# EAGLE board Stunning Densor (2) (EAGLE 9.7.0)

Size 48.21 x 71.32 mm. Coordinates in mm from the lower left corner, seen from the top.
Outline: 0,0 48.21,0 48.21,71.32 0,71.32 0,0
Copper layers (1*16): Top 0.035mm / dielectric 1.5mm / Bottom 0.035mm
Design rules "default": minimum track width 6mil, minimum drill 0.35mm, track to track 6mil, track to pad 6mil, pad to pad 6mil, via to via 6mil, smd to smd 6mil, copper to edge 40mil, drill to drill 6mil, minimum pad ring 10mil, minimum via ring 8mil, stop-mask expansion 4mil, vias tented up to drill 0mil, thermal gap 10mil

## Footprints (pad centres in the part's own frame; a part is rotated, then mirrored left to right if it is on the bottom)
BAT_3002 = smd 3.96 x 3.96: N 0,0.65 | smd 5.08 x 5.08: P 12.825,0.65; P1 -12.825,0.65
LEDRD254W60D565H860B_W = drill 0.981 pad 1.581: 1 -1.27,0; 2 1.27,0
RESAD1016W63L850D250B = drill 0.83 pad 1.43: 1 -5.08,0; 2 5.08,0

## Placement (x,y rotation side)
BAT1  BR2016  [BAT_3002]  20.19,15.43 0 top
D1  WHITE  [LEDRD254W60D565H860B_W]  22.14,51.48 180 top
D5  WHITE  [LEDRD254W60D565H860B_W]  21.79,63.41 180 top
R5  220  [RESAD1016W63L850D250B]  39.41,34.42 300 top
R6  220  [RESAD1016W63L850D250B]  39.18,52.2 300 top

## Library data of the parts
BAT1 = Tinkercad; CATEGORY: Battery-Holder; CELL_DIAMETER: 20mm; DESCRIPTION: Battery Retainer Coin, 20.0mm 1 Cell SMD (SMT) Tab; MANUFACTURER: Keystone Electronics; MPN: 3002; PART_STATUS: ACTIVE; ROHS_COMPLIANT: COMPLIANT; SERIES: -; SUB_CATEGORY: Holder; TYPE: Coin Cell
D1 D5 = Tinkercad; CATEGORY: Opto-Electronic; SUB-CATEGORY: LED; VALUE: LED_WHITE
R5 R6 = Tinkercad

## Nets
BAT1+: BAT1.P BAT1.P1 R5.2 R6.2
BAT1-: BAT1.N D1.2 D5.2
D1_A: D1.1 R5.1
D5_A: D5.1 R6.1

## Tracks (layer width: path | path; a pad name or v marks a point on that pad's centre or on a via)
BAT1+  (3 unrouted)
BAT1-  (2 unrouted)
D1_A  (1 unrouted)
D5_A  (1 unrouted)